# Altium PCB LED-InstallGuide.PcbDoc
Units mil, origin at the board's own origin, x right, y up, seen from the top; angles counter-clockwise.
Board outline 1100 x 360 mil, 2 copper layers (Top Layer, Bottom Layer); 4 components, 5 nets, 11 pads, 1 vias.
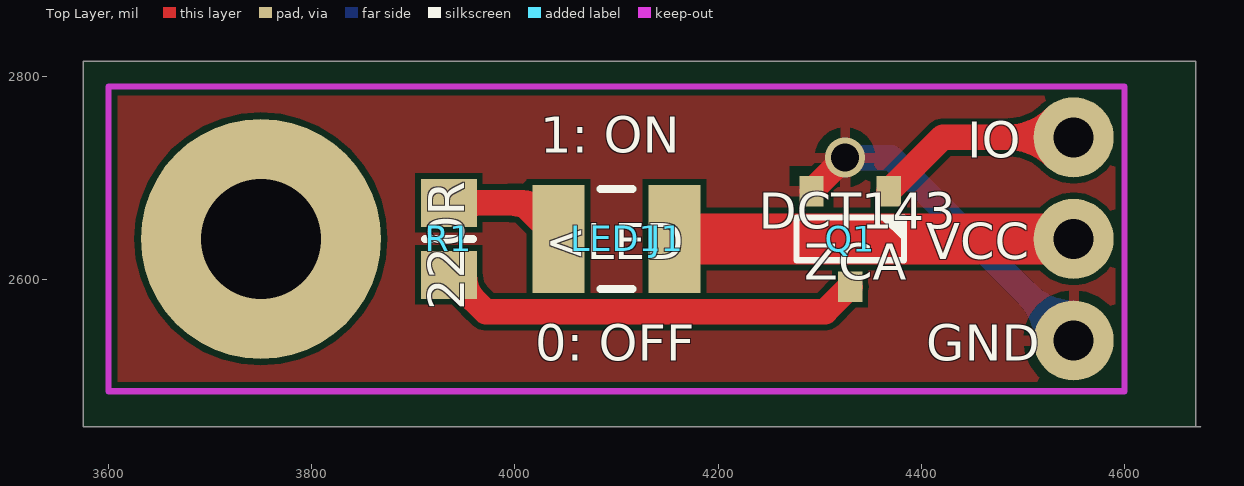
[diagram p0: Top Layer view]
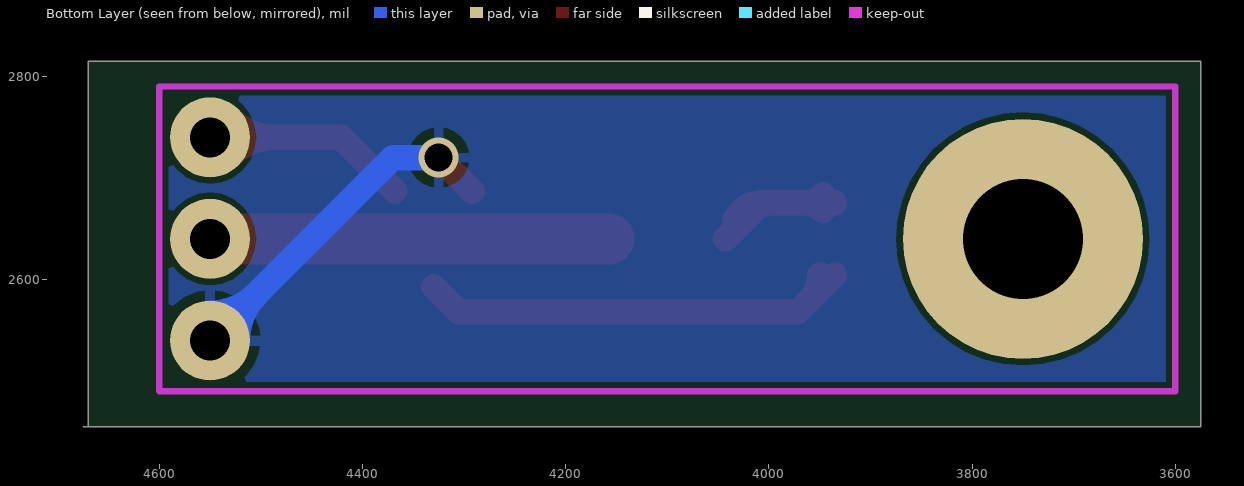
[diagram p1: Bottom Layer view, seen from below]

## Layer stack, top to bottom
Top Solder: solder mask 0.4, Solder Resist, Dk 3.5
Top Layer: signal copper 1.4
Dielectric 1: dielectric 12.6, FR-4, Dk 4.8
Bottom Layer: signal copper 1.4
Bottom Solder: solder mask 0.4, Solder Resist, Dk 3.5

## Board outline
3575,2815 3575,2455 4675,2455 4670,2455 4670,2815

## Design rules (kind name [scope] priority, off if disabled: settings)
Clearance [All] p1: gap=6
ComponentClearance [All] p1: gap=0 collisioncheckmode=3 verticalgap=0 showdistances=FALSE
PolygonConnect [All] p1: connectstyle=Relief reliefconductorwidth=10 reliefentries=4 polygonreliefangle="90 Angle" airgapwidth=10
RoutingVias [All] p1: holewidth=28 width=50 viastyle="Through Hole" minholewidth=28 minwidth=50 maxholewidth=28 maxwidth=50
SolderMaskExpansion [All] p1: expansion=4
Width [All] p1: maxlimit=100 minlimit=6 preferedwidth=10
28 further rules are at their usual default settings.

## Components (designator, comment, footprint, x,y, rotation, side; value= is the part's Value field where it differs from the comment)
J1 "CON3" DevModule 4100,2640 r0 top
LED1 "1210" C1210_N 4100,2640 r180 top
Q1 "BJT_NPN" SOT23-3 4330,2640 r270 top
R1 "4.7K" 6-0805_N 3935,2640 r90 top

## Footprints (in the part's own frame and the unit in brackets; to place one, negate y for a bottom-side part, rotate by r counter-clockwise, add the part's x,y. Pads: shape width x height; smd on the part's side, far side on the other; paste and mask are expansions set on the pad)
6-0805_N [mm] "Chip Resistor, Body 2.0x1.2mm, IPC Medium Density"
  rect 1.2x1.4 smd: 1(-0.9,0) 2(0.9,0)
  silkscreen extent 0,-0.6 0,0.6, body extent -1.07,-0.7 1.07,0.7, height 0.7
C1210_N [mm] "Chip Capacitor, Body 3.2x2.5mm, IPC Medium Density"
  rect 1.3x2.7 smd: 1(-1.45,0) 2(1.45,0)
  silkscreen extent -0.4,-1.25 0.4,1.25, body extent -1.7,-1.35 1.7,1.35, height 1.5
DevModule [mm]
  round 6 hole 3: 0(-8.89,0)
  round 2 hole 1: 1(11.43,2.54) 2(11.43,0) 3(11.43,-2.54)
  Keep-Out Layer lines w0.152: -12.7,-3.81 -12.7,3.81 12.7,3.81 12.7,-3.81 -12.7,-3.81
SOT23-3 [mil]
  rect 30x24 smd: 1(-47,38) 2(-47,-38) 3(47,0)
  silkscreen extent -21,-53 21,53, body extent -55,-57 55,57, height 51

## Part data
J1: "Connector"
LED1: library part LED_3
Q1: "Transistor"
R1: library part RES1_1

## Via types
v1: diameter 39.37, hole 27.56, Top Layer to Bottom Layer, tented both sides, 1 vias

## Nets (pads, with @x,y where several pads share a name; then routed paths per layer and width w, separated by ;. In a path a pad name is that pad's centre, name@x,y a point inside that pad or via, vN(x,y) a via of type N, cw(c..) or ccw(c..) an arc to the next point about the centre after c; other vN are vias at no path point)
GND: J1.3 Q1.2 | length 448.1
  Top Layer w25: Q1.2 v1(4325,2720)
  Bottom Layer w25: v1(4325,2720) 4370,2720 J1.3 ; J1.3@4523.13,2540 ccw(c4458.26,2540) 4504.13,2585.87 ccw(c4550,2631.74) J1.3@4550,2566.87
NetJ1_1: J1.1 Q1.1 | length 305.9
  Top Layer w25: Q1.1 4421,2740 J1.1 ; J1.1@4531,2721 ccw(c4485.13,2675.13) 4485.13,2740 ccw(c4485.13,2804.87) J1.1@4531,2759
NetLED1_2: LED1.2 R1.2 | length 239.9
  Top Layer w25: R1.2 4007.48,2675.43 ; R1.2@3946.8,2667.57 cw(c3965.79,2648.58) 3965.79,2675.43 cw(c3965.79,2702.28) R1.2@3946.8,2683.3 ; 3992.3,2675.43 cw(c3992.3,2616.95) LED1.2@4033.66,2658.3 ; LED1.2@4031.44,2661.26 ccw(c4007.48,2648.1) 4007.48,2675.43 ; LED1.2 4007.48,2675.43
NetQ1_3: Q1.3 R1.1 | length 448.8
  Top Layer w25: R1.1 3971.22,2568.35 4305.35,2568.35 Q1.3 ; R1.1@3950.06,2604.57 ccw(c3986.41,2604.57) 3960.71,2578.86
VCC: J1.2 LED1.1 | length 392.9
  Top Layer w50: LED1.1 J1.2
pads on no net: J1.0

## Polygon pours and split planes (outlines as drawn)
GND on Bottom Layer "Keep-Out Layer-No Net" (solid, remove dead copper, pour order 2): 4600,2490 3600,2490 3600,2790 4600,2790
GND on Top Layer "Keep-Out Layer-No Net" (solid, pour order 4): 4600,2490 3600,2490 3600,2790 4600,2790

## Silkscreen, mask and mechanical layers (free items; w line width, h text height)
Top Overlay:
  text "1: ON" at 4025,2725 h35.43
  text "IO" at 4445,2720 h35.43
  text "DCT143" at 4240,2650 h35.43
  text "<LED" at 4030,2620 h35.43
  text "VCC" at 4405,2620 h35.43
  text "ZCA" at 4285,2600 h35.43
  text "220R" at 3950,2570 h35.43 r90
  text "0: OFF" at 4020,2520 h35.43
  text "GND" at 4405,2520 h35.43